# Altium PCB Column.PcbDoc (part 2 of 2)
Units mm, origin at the board's own origin, x right, y up, seen from the top; angles counter-clockwise.
Board outline 110.15 x 30.8 mm, 2 copper layers (Top Layer, Bottom Layer); 69 components, 210 nets, 1010 pads, 61 vias.
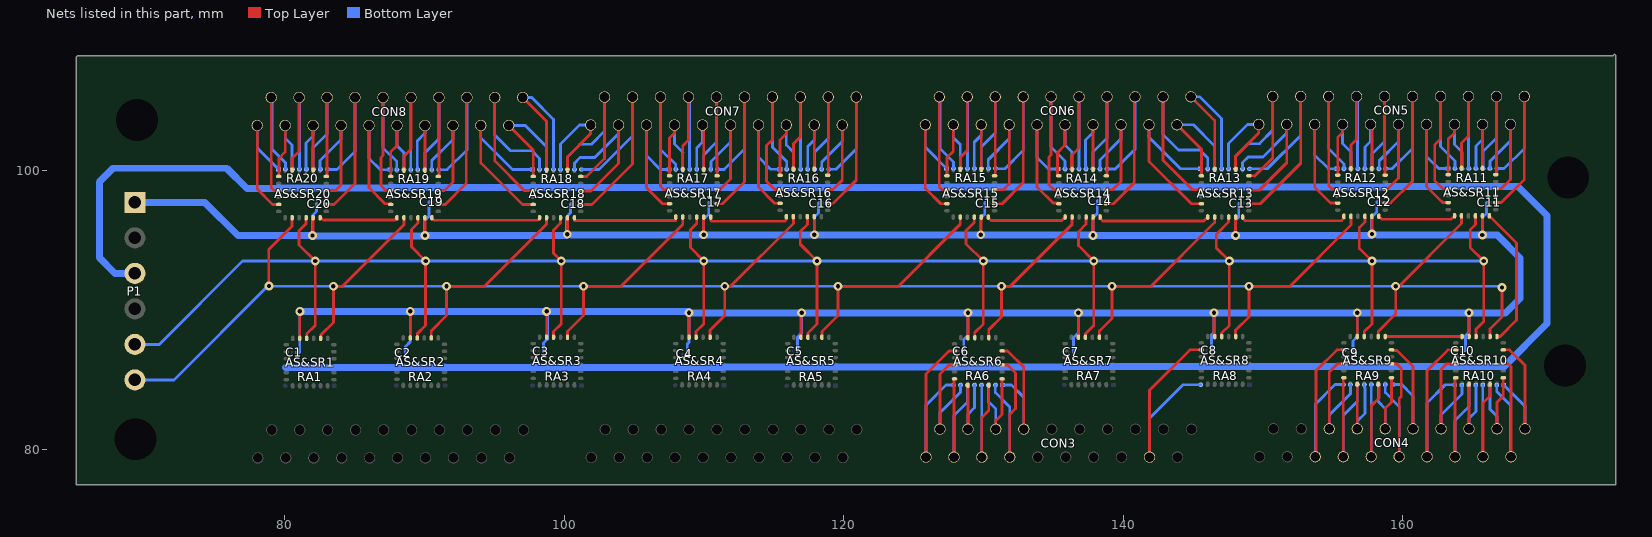
[diagram p2: the nets of this part, all layers, seen from the top]

## Via types
v1: diameter 0.635, hole 0.305, Top Layer to Bottom Layer, 61 vias

## Nets (pads, with @x,y where several pads share a name; then routed paths per layer and width w, separated by ;. In a path a pad name is that pad's centre, name@x,y a point inside that pad or via, vN(x,y) a via of type N, cw(c..) or ccw(c..) an arc to the next point about the centre after c; other vN are vias at no path point) (continued)
NewNet22: AS&SR8.2 CON3.17 RA8.8 | length 17.1
  Top Layer w0.2: CON3.17@141.894,79.471 141.894,84.254 144.79,87.15 AS&SR8.2@145.6,87.15
  Bottom Layer w0.2: CON3.17@141.894,79.471 141.894,82.254 144.29,84.65 RA8.8@145.55,84.65
NewNet23: AS&SR9.19 AS&SR10.24 | length 5.5
  Top Layer w0.2: AS&SR9.19@158.75,88.1 AS&SR10.24@164.25,88.1
NewNet24: AS&SR9.17 CON4.12 RA9.1 | length 10.7
  Top Layer w0.2: AS&SR9.17@159.2,87.15 159.25,87.1 159.6,87.1 160.75,85.95 CON4.12@160.75,81.5
  Bottom Layer w0.2: RA9.1@159.26,84.66 159.86,84.66 159.9,84.7 160.75,83.85 CON4.12@160.75,81.5
NewNet25: AS&SR9.15 CON4.11 RA9.2 | length 12.8
  Top Layer w0.2: AS&SR9.15@159.2,86.15 159.55,86.15 159.9,85.8 159.9,83.8 159.75,83.65 CON4.11@159.75,79.5
  Bottom Layer w0.2: RA9.2@158.76,84.66 158.76,84.09 159.75,83.1 CON4.11@159.75,79.5
NewNet26: AS&SR9.13 CON4.10 RA9.3 | length 7.2
  Top Layer w0.2: CON4.10@158.75,81.5 158.75,82.95 159.2,83.4 AS&SR9.13@159.2,85.15
  Bottom Layer w0.2: RA9.3@158.26,84.66 158.25,84.65 158.25,83.45 158.75,82.95 CON4.10@158.75,81.5
NewNet27: AS&SR9.11 CON4.9 RA9.4 | length 10.6
  Top Layer w0.2: CON4.9@157.75,79.5 157.75,83.15 158.3,83.7 158.3,84.65 AS&SR9.11@158.25,84.7
  Bottom Layer w0.2: CON4.9@157.75,79.5 157.76,79.51 RA9.4@157.76,84.66
NewNet28: AS&SR9.8 CON4.8 RA9.5 | length 6.6
  Top Layer w0.2: CON4.8@156.75,81.5 AS&SR9.8@156.75,84.7
  Bottom Layer w0.2: CON4.8@156.75,81.5 156.75,82.05 157.3,82.6 157.3,84.459 157.26,84.499 RA9.5@157.26,84.66
NewNet29: AS&SR9.6 CON4.7 RA9.6 | length 11.2
  Top Layer w0.2: CON4.7@155.75,79.5 155.75,85.1 AS&SR9.6@155.8,85.15
  Bottom Layer w0.2: CON4.7@155.75,79.5 155.75,82.45 156.75,83.45 156.75,84.65 RA9.6@156.76,84.66
NewNet30: AS&SR9.4 CON4.6 RA9.7 | length 9.1
  Top Layer w0.2: CON4.6@154.75,81.5 154.75,85.55 155.35,86.15 AS&SR9.4@155.8,86.15
  Bottom Layer w0.2: CON4.6@154.75,81.5 154.75,82.5 156.26,84.01 RA9.7@156.26,84.66
NewNet31: AS&SR9.2 CON4.5 RA9.8 | length 15.1
  Top Layer w0.2: CON4.5@153.75,79.5 153.8,79.55 153.8,85.65 155.3,87.15 AS&SR9.2@155.8,87.15
  Bottom Layer w0.2: CON4.5@153.75,79.5 153.75,83.25 155.16,84.66 RA9.8@155.76,84.66
NewNet32: AS&SR10.17 CON4.20 RA10.1 | length 10.3
  Top Layer w0.2: AS&SR10.17@167.2,87.15 167.65,87.15 168.75,86.05 CON4.20@168.75,81.5
  Bottom Layer w0.2: RA10.1@167.23,84.63 168.75,83.11 CON4.20@168.75,81.5
NewNet33: AS&SR10.15 CON4.19 RA10.2 | length 12.6
  Top Layer w0.2: AS&SR10.15@167.2,86.15 167.55,86.15 167.75,85.95 CON4.19@167.75,79.5
  Bottom Layer w0.2: RA10.2@166.73,84.63 166.73,84.17 167.7,83.2 167.7,79.55 CON4.19@167.75,79.5
NewNet34: AS&SR10.13 CON4.18 RA10.3 | length 7.2
  Top Layer w0.2: CON4.18@166.75,81.5 166.75,83.4 167.2,83.85 AS&SR10.13@167.2,85.15
  Bottom Layer w0.2: RA10.3@166.23,84.63 166.25,84.61 166.25,82.9 166.75,82.4 CON4.18@166.75,81.5
NewNet35: AS&SR10.11 CON4.17 RA10.4 | length 10.5
  Top Layer w0.2: CON4.17@165.75,79.5 165.75,83.35 166.25,83.85 AS&SR10.11@166.25,84.7
  Bottom Layer w0.2: RA10.4@165.73,84.63 165.73,79.52 CON4.17@165.75,79.5
NewNet36: AS&SR10.8 CON4.16 RA10.5 | length 6.5
  Top Layer w0.2: CON4.16@164.75,81.5 AS&SR10.8@164.75,84.7
  Bottom Layer w0.2: CON4.16@164.75,81.5 164.75,82.25 165.25,82.75 165.25,84.61 RA10.5@165.23,84.63
NewNet37: AS&SR10.6 CON4.15 RA10.6 | length 11.2
  Top Layer w0.2: CON4.15@163.75,79.5 163.75,85.1 AS&SR10.6@163.8,85.15
  Bottom Layer w0.2: CON4.15@163.75,79.5 163.75,82.1 164.75,83.1 164.75,84.61 RA10.6@164.73,84.63
NewNet38: AS&SR10.4 CON4.14 RA10.7 | length 9.2
  Top Layer w0.2: CON4.14@162.75,81.5 162.75,85.75 163.15,86.15 AS&SR10.4@163.8,86.15
  Bottom Layer w0.2: CON4.14@162.75,81.5 162.75,82.5 164.25,84 164.25,84.61 RA10.7@164.23,84.63
NewNet39: AS&SR10.2 CON4.13 RA10.8 | length 15.2
  Top Layer w0.2: CON4.13@161.75,79.5 161.75,85.65 163.25,87.15 AS&SR10.2@163.8,87.15
  Bottom Layer w0.2: CON4.13@161.75,79.5 161.75,83.35 163.05,84.65 163.71,84.65 RA10.8@163.73,84.63
NewNet40: 
NewNet41: 
NewNet42: AS&SR6.17 CON3.8 RA6.1 | length 10.7
  Top Layer w0.2: AS&SR6.17@131.34,87.07 131.733,87.07 131.808,86.995 132.894,85.909 CON3.8@132.894,81.471
  Bottom Layer w0.2: RA6.1@131.36,84.63 132.02,84.63 132.894,83.756 CON3.8@132.894,81.471
NewNet43: AS&SR6.15 CON3.7 RA6.2 | length 13
  Top Layer w0.2: AS&SR6.15@131.34,86.07 131.733,86.07 131.808,85.995 132.31,85.493 132.31,82.94 131.894,82.524 CON3.7@131.894,79.471
  Bottom Layer w0.2: RA6.2@130.86,84.63 130.86,84.09 131.894,83.056 CON3.7@131.894,79.471
NewNet44: AS&SR6.13 CON3.6 RA6.3 | length 7.2
  Top Layer w0.2: CON3.6@130.894,81.471 130.894,82.084 131.34,82.53 AS&SR6.13@131.34,85.07
  Bottom Layer w0.2: RA6.3@130.36,84.63 130.36,83.44 130.894,82.906 CON3.6@130.894,81.471
NewNet45: AS&SR6.11 CON3.5 RA6.4 | length 10.5
  Top Layer w0.2: CON3.5@129.894,79.471 129.894,82.314 130.39,82.81 AS&SR6.11@130.39,84.62
  Bottom Layer w0.2: RA6.4@129.86,84.63 129.885,84.605 129.885,79.48 CON3.5@129.894,79.471
NewNet46: AS&SR6.8 CON3.4 RA6.5 | length 6.5
  Top Layer w0.2: AS&SR6.8@128.89,84.62 128.894,84.616 CON3.4@128.894,81.471
  Bottom Layer w0.2: CON3.4@128.894,81.471 128.894,82.544 129.36,83.01 RA6.5@129.36,84.63
NewNet47: AS&SR6.6 CON3.3 RA6.6 | length 11.2
  Top Layer w0.2: CON3.3@127.894,79.471 AS&SR6.6@127.894,85.024 ; AS&SR6.6@127.894,85.024 AS&SR6.6@127.94,85.07 AS&SR6.6@127.894,85.024
  Bottom Layer w0.2: CON3.3@127.894,79.471 127.894,82.444 128.86,83.41 RA6.6@128.86,84.63
NewNet48: AS&SR6.4 CON3.2 RA6.7 | length 9
  Top Layer w0.2: CON3.2@126.894,81.471 126.894,85.417 127.547,86.07 AS&SR6.4@127.94,86.07
  Bottom Layer w0.2: CON3.2@126.894,81.471 126.894,82.644 128.36,84.11 RA6.7@128.36,84.63
NewNet49: AS&SR6.2 CON3.1 RA6.8 | length 15
  Top Layer w0.2: CON3.1@125.894,79.471 125.894,85.417 127.547,87.07 AS&SR6.2@127.94,87.07
  Bottom Layer w0.2: CON3.1@125.894,79.471 125.894,83.184 127.34,84.63 RA6.8@127.86,84.63
NewNet50: 
NewNet51: 
NewNet52: 
NewNet53: 
NewNet54: AS&SR16.19 AS&SR17.24 | length 5.9
  Top Layer w0.2: AS&SR17.24@110.5,96.65 110.5,96.42 110.57,96.35 115.79,96.35 115.91,96.47 AS&SR16.19@115.91,96.68
NewNet55: AS&SR16.17 CON7.8 RA16.1 | length 10.7
  Top Layer w0.2: CON7.8@113.906,103.229 113.906,98.791 114.992,97.705 115.067,97.63 AS&SR16.17@115.46,97.63
  Bottom Layer w0.2: CON7.8@113.906,103.229 113.906,100.944 114.78,100.07 RA16.1@115.44,100.07
NewNet56: AS&SR16.15 CON7.7 RA16.2 | length 13
  Top Layer w0.2: CON7.7@114.906,105.229 114.906,102.176 114.49,101.76 114.49,99.207 114.992,98.705 115.067,98.63 AS&SR16.15@115.46,98.63
  Bottom Layer w0.2: CON7.7@114.906,105.229 114.906,101.644 115.94,100.61 RA16.2@115.94,100.07
NewNet57: AS&SR16.13 CON7.6 RA16.3 | length 7.2
  Top Layer w0.2: AS&SR16.13@115.46,99.63 115.46,102.17 115.906,102.616 CON7.6@115.906,103.229
  Bottom Layer w0.2: CON7.6@115.906,103.229 115.906,101.794 116.44,101.26 RA16.3@116.44,100.07
NewNet58: AS&SR16.11 CON7.5 RA16.4 | length 10.5
  Top Layer w0.2: AS&SR16.11@116.41,100.08 116.41,101.89 116.906,102.386 CON7.5@116.906,105.229
  Bottom Layer w0.2: CON7.5@116.906,105.229 116.915,105.22 116.915,100.095 RA16.4@116.94,100.07
NewNet59: AS&SR16.8 CON7.4 RA16.5 | length 6.5
  Top Layer w0.2: CON7.4@117.906,103.229 117.906,100.084 AS&SR16.8@117.91,100.08
  Bottom Layer w0.2: RA16.5@117.44,100.07 117.44,101.69 117.906,102.156 CON7.4@117.906,103.229
NewNet60: AS&SR16.6 CON7.3 RA16.6 | length 11.2
  Top Layer w0.2: CON7.3@118.906,105.229 AS&SR16.6@118.906,99.676 ; AS&SR16.6@118.906,99.676 AS&SR16.6@118.86,99.63 AS&SR16.6@118.906,99.676
  Bottom Layer w0.2: RA16.6@117.94,100.07 117.94,101.29 118.906,102.256 CON7.3@118.906,105.229
NewNet61: AS&SR16.4 CON7.2 RA16.7 | length 9
  Top Layer w0.2: AS&SR16.4@118.86,98.63 119.253,98.63 119.906,99.283 CON7.2@119.906,103.229
  Bottom Layer w0.2: RA16.7@118.44,100.07 118.44,100.59 119.906,102.056 CON7.2@119.906,103.229
NewNet62: AS&SR16.2 CON7.1 RA16.8 | length 15
  Top Layer w0.2: AS&SR16.2@118.86,97.63 119.253,97.63 120.906,99.283 CON7.1@120.906,105.229
  Bottom Layer w0.2: RA16.8@118.94,100.07 119.46,100.07 120.906,101.516 CON7.1@120.906,105.229
NewNet63: AS&SR19.19 AS&SR20.24 | length 5.6
  Top Layer w0.2: AS&SR20.24@82.55,96.6 82.6,96.6 82.76,96.44 87.89,96.44 AS&SR19.19@88.05,96.6
NewNet64: AS&SR20.17 CON8.20 RA20.1 | length 10.3
  Top Layer w0.2: CON8.20@78.05,103.2 78.05,98.65 79.15,97.55 AS&SR20.17@79.6,97.55
  Bottom Layer w0.2: CON8.20@78.05,103.2 78.05,101.59 RA20.1@79.57,100.07
NewNet65: AS&SR20.15 CON8.19 RA20.2 | length 12.6
  Top Layer w0.2: CON8.19@79.05,105.2 79.05,98.75 79.25,98.55 AS&SR20.15@79.6,98.55
  Bottom Layer w0.2: CON8.19@79.05,105.2 79.1,105.15 79.1,101.5 80.07,100.53 RA20.2@80.07,100.07
NewNet66: AS&SR20.13 CON8.18 RA20.3 | length 7.2
  Top Layer w0.2: AS&SR20.13@79.6,99.55 79.6,100.85 80.05,101.3 CON8.18@80.05,103.2
  Bottom Layer w0.2: CON8.18@80.05,103.2 80.05,102.3 80.55,101.8 80.55,100.09 RA20.3@80.57,100.07
NewNet67: AS&SR20.11 CON8.17 RA20.4 | length 10.5
  Top Layer w0.2: AS&SR20.11@80.55,100 80.55,100.85 81.05,101.35 CON8.17@81.05,105.2
  Bottom Layer w0.2: CON8.17@81.05,105.2 81.07,105.18 RA20.4@81.07,100.07
NewNet68: AS&SR20.8 CON8.16 RA20.5 | length 6.5
  Top Layer w0.2: AS&SR20.8@82.05,100 CON8.16@82.05,103.2
  Bottom Layer w0.2: RA20.5@81.57,100.07 81.55,100.09 81.55,101.95 82.05,102.45 CON8.16@82.05,103.2
NewNet69: AS&SR20.6 CON8.15 RA20.6 | length 11.2
  Top Layer w0.2: AS&SR20.6@83,99.55 83.05,99.6 CON8.15@83.05,105.2
  Bottom Layer w0.2: RA20.6@82.07,100.07 82.05,100.09 82.05,101.6 83.05,102.6 CON8.15@83.05,105.2
NewNet70: AS&SR20.4 CON8.14 RA20.7 | length 9.2
  Top Layer w0.2: AS&SR20.4@83,98.55 83.65,98.55 84.05,98.95 CON8.14@84.05,103.2
  Bottom Layer w0.2: RA20.7@82.57,100.07 82.55,100.09 82.55,100.7 84.05,102.2 CON8.14@84.05,103.2
NewNet71: AS&SR20.2 CON8.13 RA20.8 | length 15.2
  Top Layer w0.2: AS&SR20.2@83,97.55 83.55,97.55 85.05,99.05 CON8.13@85.05,105.2
  Bottom Layer w0.2: RA20.8@83.07,100.07 83.09,100.05 83.75,100.05 85.05,101.35 CON8.13@85.05,105.2
NewNet72: AS&SR18.19 AS&SR19.24 | length 7.9
  Top Layer w0.2: AS&SR19.24@90.55,96.6 90.74,96.41 90.75,96.42 98.11,96.42 98.25,96.56 AS&SR18.19@98.25,96.6
NewNet73: AS&SR19.17 CON8.12 RA19.1 | length 10.7
  Top Layer w0.2: CON8.12@86.05,103.2 86.05,98.75 87.2,97.6 87.55,97.6 AS&SR19.17@87.6,97.55
  Bottom Layer w0.2: CON8.12@86.05,103.2 86.05,100.85 86.9,100 86.94,100.04 RA19.1@87.54,100.04
NewNet74: AS&SR19.15 CON8.11 RA19.2 | length 12.8
  Top Layer w0.2: CON8.11@87.05,105.2 87.05,101.05 86.9,100.9 86.9,98.9 87.25,98.55 AS&SR19.15@87.6,98.55
  Bottom Layer w0.2: CON8.11@87.05,105.2 87.05,101.6 88.04,100.61 RA19.2@88.04,100.04
NewNet75: AS&SR19.13 CON8.10 RA19.3 | length 7.2
  Top Layer w0.2: AS&SR19.13@87.6,99.55 87.6,101.3 88.05,101.75 CON8.10@88.05,103.2
  Bottom Layer w0.2: CON8.10@88.05,103.2 88.05,101.75 88.55,101.25 88.55,100.05 RA19.3@88.54,100.04
NewNet76: AS&SR19.11 CON8.9 RA19.4 | length 10.5
  Top Layer w0.2: AS&SR19.11@88.54,100.05 88.54,101 89.05,101.51 CON8.9@89.05,105.2
  Bottom Layer w0.2: RA19.4@89.04,100.04 89.04,105.19 CON8.9@89.05,105.2
NewNet77: AS&SR19.8 CON8.8 RA19.5 | length 6.6
  Top Layer w0.2: AS&SR19.8@90.05,100 CON8.8@90.05,103.2
  Bottom Layer w0.2: RA19.5@89.54,100.04 89.54,100.201 89.5,100.241 89.5,102.1 90.05,102.65 CON8.8@90.05,103.2
NewNet78: AS&SR19.6 CON8.7 RA19.6 | length 11.2
  Top Layer w0.2: AS&SR19.6@91,99.55 91.05,99.6 CON8.7@91.05,105.2
  Bottom Layer w0.2: RA19.6@90.04,100.04 90.05,100.05 90.05,101.25 91.05,102.25 CON8.7@91.05,105.2
NewNet79: AS&SR19.4 CON8.6 RA19.7 | length 9.1
  Top Layer w0.2: AS&SR19.4@91,98.55 91.45,98.55 92.05,99.15 CON8.6@92.05,103.2
  Bottom Layer w0.2: RA19.7@90.54,100.04 90.54,100.69 92.05,102.2 CON8.6@92.05,103.2
NewNet80: AS&SR19.2 CON8.5 RA19.8 | length 15.1
  Top Layer w0.2: AS&SR19.2@91,97.55 91.5,97.55 93,99.05 93,105.15 CON8.5@93.05,105.2
  Bottom Layer w0.2: RA19.8@91.04,100.04 91.64,100.04 93.05,101.45 CON8.5@93.05,105.2
NewNet81: AS&SR17.19 AS&SR18.24 | length 7.7
  Top Layer w0.2: AS&SR18.24@100.75,96.6 100.75,96.43 100.77,96.41 108,96.41 AS&SR17.19@108,96.65
NewNet82: AS&SR18.17 CON8.4 RA18.1 | length 13.2
  Top Layer w0.2: CON8.4@94.05,103.2 94.05,100.52 97.02,97.55 AS&SR18.17@97.8,97.55
  Bottom Layer w0.2: CON8.4@94.05,103.2 94.05,102.31 96.31,100.05 RA18.1@97.75,100.05
NewNet83: AS&SR18.15 CON8.3 RA18.2 | length 15.5
  Top Layer w0.2: CON8.3@95.05,105.2 95.05,100.66 97.16,98.55 AS&SR18.15@97.8,98.55
  Bottom Layer w0.2: CON8.3@95.05,105.2 95.05,102.5 96.16,101.39 97.7,101.39 98.25,100.84 RA18.2@98.25,100.05
NewNet84: AS&SR18.13 CON8.2 RA18.3 | length 9.3
  Top Layer w0.2: CON8.2@96.05,103.2 97.8,101.45 AS&SR18.13@97.8,99.55
  Bottom Layer w0.2: CON8.2@96.05,103.2 97.23,103.2 98.75,101.68 RA18.3@98.75,100.05
NewNet85: AS&SR18.11 CON8.1 RA18.4 | length 12.3
  Top Layer w0.2: CON8.1@97.05,105.2 98.75,103.5 AS&SR18.11@98.75,100
  Bottom Layer w0.2: CON8.1@97.05,105.2 97.69,105.2 99.25,103.64 RA18.4@99.25,100.05
NewNet86: AS&SR18.8 CON7.20 RA18.5 | length 8.5
  Top Layer w0.2: AS&SR18.8@100.25,100 100.25,100.95 101.906,102.606 CON7.20@101.906,103.229
  Bottom Layer w0.2: RA18.5@99.75,100.05 99.75,101.87 101.109,103.229 CON7.20@101.906,103.229
NewNet87: AS&SR18.6 CON7.19 RA18.6 | length 13.4
  Top Layer w0.2: AS&SR18.6@101.2,99.55 101.61,99.55 101.62,99.54 102.906,100.826 CON7.19@102.906,105.229
  Bottom Layer w0.2: RA18.6@100.25,100.05 100.25,100.95 101.15,101.85 101.95,101.85 102.906,102.806 CON7.19@102.906,105.229
NewNet88: AS&SR18.4 CON7.18 RA18.7 | length 11.4
  Top Layer w0.2: AS&SR18.4@101.2,98.55 101.23,98.52 101.94,98.52 103.906,100.486 CON7.18@103.906,103.229
  Bottom Layer w0.2: RA18.7@100.75,100.05 100.75,100.5 101.15,100.9 102.2,100.9 103.906,102.606 CON7.18@103.906,103.229
NewNet89: AS&SR18.2 CON7.17 RA18.8 | length 17.1
  Top Layer w0.2: AS&SR18.2@101.2,97.55 102.01,97.55 104.906,100.446 CON7.17@104.906,105.229
  Bottom Layer w0.2: RA18.8@101.25,100.05 102.51,100.05 104.906,102.446 CON7.17@104.906,105.229
NewNet90: AS&SR17.17 CON7.16 RA17.1 | length 10.8
  Top Layer w0.2: CON7.16@105.906,103.229 105.906,98.744 107.05,97.6 AS&SR17.17@107.55,97.6
  Bottom Layer w0.2: CON7.16@105.906,103.229 105.906,101.044 106.89,100.06 RA17.1@107.5,100.06
NewNet91: AS&SR17.15 CON7.15 RA17.2 | length 12.8
  Top Layer w0.2: CON7.15@106.906,105.229 106.906,98.844 107.15,98.6 AS&SR17.15@107.55,98.6
  Bottom Layer w0.2: CON7.15@106.906,105.229 106.906,101.494 108,100.4 RA17.2@108,100.06
NewNet92: AS&SR17.13 CON7.14 RA17.3 | length 7.2
  Top Layer w0.2: AS&SR17.13@107.55,99.6 107.55,102.3 107.906,102.656 CON7.14@107.906,103.229
  Bottom Layer w0.2: CON7.14@107.906,103.229 107.906,101.866 108.506,101.266 108.5,101.26 RA17.3@108.5,100.06
NewNet93: AS&SR17.11 CON7.13 RA17.4 | length 10.6
  Top Layer w0.2: AS&SR17.11@108.5,100.05 108.5,101.75 108.906,102.156 CON7.13@108.906,105.229
  Bottom Layer w0.2: CON7.13@108.906,105.229 108.975,105.16 108.975,100.085 RA17.4@109,100.06
NewNet95: AS&SR17.8 CON7.12 RA17.5 | length 6.6
  Top Layer w0.2: CON7.12@109.906,103.229 110,103.135 AS&SR17.8@110,100.05
  Bottom Layer w0.2: RA17.5@109.5,100.06 109.5,101.26 109.5,101.6 109.906,102.006 CON7.12@109.906,103.229
NewNet96: AS&SR17.6 CON7.11 RA17.6 | length 11.2
  Top Layer w0.2: CON7.11@110.906,105.229 110.906,100.999 110.941,100.964 AS&SR17.6@110.941,99.6
  Bottom Layer w0.2: RA17.6@110,100.06 110,101.1 110.906,102.006 CON7.11@110.906,105.229
NewNet97: AS&SR17.4 CON7.10 RA17.7 | length 8.9
  Top Layer w0.2: AS&SR17.4@110.95,98.6 111.126,98.6 111.906,99.38 CON7.10@111.906,103.229
  Bottom Layer w0.2: RA17.7@110.5,100.06 110.525,100.085 110.525,100.625 111.906,102.006 CON7.10@111.906,103.229
NewNet98: AS&SR17.2 CON7.9 RA17.8 | length 14.9
  Top Layer w0.2: AS&SR17.2@110.95,97.6 111.343,97.6 111.418,97.675 112.906,99.163 CON7.9@112.906,105.229
  Bottom Layer w0.2: RA17.8@111,100.06 111.46,100.06 112.906,101.506 CON7.9@112.906,105.229
NewNet99: AS&SR11.19 AS&SR12.24 | length 5.6
  Top Layer w0.2: AS&SR12.24@158.3,96.7 158.51,96.49 163.47,96.49 AS&SR11.19@163.71,96.73
NewNet101: AS&SR12.19 AS&SR13.24 | length 7.6
  Top Layer w0.2: AS&SR13.24@148.55,96.65 148.55,96.56 148.72,96.39 155.63,96.39 155.8,96.56 AS&SR12.19@155.8,96.7
NewNet102: AS&SR12.17 CON5.16 RA12.1 | length 10.8
  Top Layer w0.2: CON5.16@153.706,103.279 153.706,98.794 154.85,97.65 AS&SR12.17@155.35,97.65
  Bottom Layer w0.2: CON5.16@153.706,103.279 153.706,101.094 154.69,100.11 RA12.1@155.3,100.11
NewNet103: AS&SR12.15 CON5.15 RA12.2 | length 12.8
  Top Layer w0.2: CON5.15@154.706,105.279 154.706,98.894 154.95,98.65 AS&SR12.15@155.35,98.65
  Bottom Layer w0.2: CON5.15@154.706,105.279 154.706,101.544 155.8,100.45 RA12.2@155.8,100.11
NewNet104: AS&SR12.13 CON5.14 RA12.3 | length 7.2
  Top Layer w0.2: AS&SR12.13@155.35,99.65 155.35,102.35 155.706,102.706 CON5.14@155.706,103.279
  Bottom Layer w0.2: CON5.14@155.706,103.279 155.706,101.916 156.306,101.316 156.3,101.31 RA12.3@156.3,100.11
NewNet105: AS&SR12.11 CON5.13 RA12.4 | length 10.6
  Top Layer w0.2: AS&SR12.11@156.3,100.1 156.3,101.8 156.706,102.206 CON5.13@156.706,105.279
  Bottom Layer w0.2: CON5.13@156.706,105.279 156.775,105.21 156.775,100.135 RA12.4@156.8,100.11
NewNet106: 
NewNet107: AS&SR12.8 CON5.12 RA12.5 | length 6.6
  Top Layer w0.2: CON5.12@157.706,103.279 157.8,103.185 AS&SR12.8@157.8,100.1
  Bottom Layer w0.2: RA12.5@157.3,100.11 157.3,101.31 157.3,101.65 157.706,102.056 CON5.12@157.706,103.279
NewNet108: AS&SR12.6 CON5.11 RA12.6 | length 11.2
  Top Layer w0.2: CON5.11@158.706,105.279 158.706,101.049 158.741,101.014 AS&SR12.6@158.741,99.65
  Bottom Layer w0.2: RA12.6@157.8,100.11 157.8,101.15 158.706,102.056 CON5.11@158.706,105.279
NewNet109: AS&SR12.4 CON5.10 RA12.7 | length 8.9
  Top Layer w0.2: AS&SR12.4@158.75,98.65 158.926,98.65 159.706,99.43 CON5.10@159.706,103.279
  Bottom Layer w0.2: RA12.7@158.3,100.11 158.325,100.135 158.325,100.675 159.706,102.056 CON5.10@159.706,103.279
NewNet110: AS&SR12.2 CON5.9 RA12.8 | length 14.9
  Top Layer w0.2: AS&SR12.2@158.75,97.65 159.143,97.65 160.706,99.213 CON5.9@160.706,105.279
  Bottom Layer w0.2: RA12.8@158.8,100.11 159.26,100.11 160.706,101.556 CON5.9@160.706,105.279
NewNet111: AS&SR13.19 AS&SR14.24 | length 8
  Top Layer w0.2: AS&SR14.24@138.35,96.65 138.35,96.57 138.55,96.37 145.77,96.37 AS&SR13.19@146.05,96.65
NewNet112: AS&SR13.17 CON6.4 RA13.1 | length 13.2
  Top Layer w0.2: CON6.4@141.85,103.25 141.85,100.63 144.88,97.6 AS&SR13.17@145.6,97.6
  Bottom Layer w0.2: CON6.4@141.85,103.25 141.85,102.36 144.11,100.1 RA13.1@145.55,100.1
NewNet113: AS&SR13.15 CON6.3 RA13.2 | length 15.5
  Top Layer w0.2: CON6.3@142.85,105.25 142.85,100.71 144.96,98.6 AS&SR13.15@145.6,98.6
  Bottom Layer w0.2: CON6.3@142.85,105.25 142.85,102.55 143.96,101.44 145.5,101.44 146.05,100.89 RA13.2@146.05,100.1
NewNet114: AS&SR13.13 CON6.2 RA13.3 | length 9.3
  Top Layer w0.2: CON6.2@143.85,103.25 145.6,101.5 AS&SR13.13@145.6,99.6
  Bottom Layer w0.2: CON6.2@143.85,103.25 145.03,103.25 146.55,101.73 RA13.3@146.55,100.1
NewNet115: AS&SR13.11 CON6.1 RA13.4 | length 12.3
  Top Layer w0.2: CON6.1@144.85,105.25 146.55,103.55 AS&SR13.11@146.55,100.05
  Bottom Layer w0.2: CON6.1@144.85,105.25 145.49,105.25 147.05,103.69 RA13.4@147.05,100.1
NewNet116: AS&SR13.8 CON5.20 RA13.5 | length 8.5
  Top Layer w0.2: AS&SR13.8@148.05,100.05 148.05,101 149.706,102.656 CON5.20@149.706,103.279
  Bottom Layer w0.2: RA13.5@147.55,100.1 147.55,101.92 148.909,103.279 CON5.20@149.706,103.279
NewNet117: AS&SR13.6 CON5.19 RA13.6 | length 13.4
  Top Layer w0.2: AS&SR13.6@149,99.6 149.41,99.6 149.42,99.59 150.706,100.876 CON5.19@150.706,105.279
  Bottom Layer w0.2: RA13.6@148.05,100.1 148.05,101 148.95,101.9 149.75,101.9 150.706,102.856 CON5.19@150.706,105.279
NewNet118: AS&SR13.4 CON5.18 RA13.7 | length 11.4
  Top Layer w0.2: AS&SR13.4@149,98.6 149.03,98.57 149.74,98.57 151.706,100.536 CON5.18@151.706,103.279
  Bottom Layer w0.2: RA13.7@148.55,100.1 148.55,100.55 148.95,100.95 150,100.95 151.706,102.656 CON5.18@151.706,103.279
NewNet119: AS&SR13.2 CON5.17 RA13.8 | length 17.1
  Top Layer w0.2: AS&SR13.2@149,97.6 149.81,97.6 152.706,100.496 CON5.17@152.706,105.279
  Bottom Layer w0.2: RA13.8@149.05,100.1 150.31,100.1 152.706,102.496 CON5.17@152.706,105.279
NewNet120: AS&SR14.19 AS&SR15.24 | length 5.7
  Top Layer w0.2: AS&SR15.24@130.35,96.65 130.35,96.61 130.55,96.41 135.61,96.41 AS&SR14.19@135.85,96.65
NewNet121: AS&SR14.17 CON6.12 RA14.1 | length 10.7
  Top Layer w0.2: CON6.12@133.85,103.25 133.85,98.8 135,97.65 135.35,97.65 AS&SR14.17@135.4,97.6
  Bottom Layer w0.2: CON6.12@133.85,103.25 133.85,100.9 134.7,100.05 134.74,100.09 RA14.1@135.34,100.09
NewNet122: AS&SR14.15 CON6.11 RA14.2 | length 12.8
  Top Layer w0.2: CON6.11@134.85,105.25 134.85,101.1 134.7,100.95 134.7,98.95 135.05,98.6 AS&SR14.15@135.4,98.6
  Bottom Layer w0.2: CON6.11@134.85,105.25 134.85,101.65 135.84,100.66 RA14.2@135.84,100.09
NewNet123: AS&SR14.13 CON6.10 RA14.3 | length 7.3
  Top Layer w0.2: AS&SR14.13@135.4,99.6 135.3,99.7 135.3,101.25 135.85,101.8 CON6.10@135.85,103.25
  Bottom Layer w0.2: CON6.10@135.85,103.25 135.85,101.8 136.35,101.3 136.35,100.1 RA14.3@136.34,100.09
NewNet124: AS&SR14.11 CON6.9 RA14.4 | length 10.6
  Top Layer w0.2: AS&SR14.11@136.35,100.05 136.3,100.1 136.3,101.05 136.85,101.6 CON6.9@136.85,105.25
  Bottom Layer w0.2: RA14.4@136.84,100.09 136.84,105.24 CON6.9@136.85,105.25
NewNet125: AS&SR14.8 CON6.8 RA14.5 | length 6.6
  Top Layer w0.2: AS&SR14.8@137.85,100.05 CON6.8@137.85,103.25
  Bottom Layer w0.2: RA14.5@137.34,100.09 137.34,100.251 137.3,100.291 137.3,102.15 137.85,102.7 CON6.8@137.85,103.25
NewNet126: AS&SR14.6 CON6.7 RA14.6 | length 11.2
  Top Layer w0.2: AS&SR14.6@138.8,99.6 138.85,99.65 CON6.7@138.85,105.25
  Bottom Layer w0.2: RA14.6@137.84,100.09 137.85,100.1 137.85,101.3 138.85,102.3 CON6.7@138.85,105.25
NewNet127: AS&SR14.4 CON6.6 RA14.7 | length 9.1
  Top Layer w0.2: AS&SR14.4@138.8,98.6 139.25,98.6 139.85,99.2 CON6.6@139.85,103.25
  Bottom Layer w0.2: RA14.7@138.34,100.09 138.34,100.74 139.85,102.25 CON6.6@139.85,103.25
NewNet128: AS&SR14.2 CON6.5 RA14.8 | length 15.1
  Top Layer w0.2: AS&SR14.2@138.8,97.6 139.3,97.6 140.8,99.1 140.8,105.2 CON6.5@140.85,105.25
  Bottom Layer w0.2: RA14.8@138.84,100.09 139.44,100.09 140.85,101.5 CON6.5@140.85,105.25
NewNet129: AS&SR15.17 CON6.20 RA15.1 | length 10.3
  Top Layer w0.2: CON6.20@125.85,103.25 125.85,98.7 126.95,97.6 AS&SR15.17@127.4,97.6
  Bottom Layer w0.2: CON6.20@125.85,103.25 125.85,101.64 RA15.1@127.37,100.12
NewNet130: AS&SR15.15 CON6.19 RA15.2 | length 12.6
  Top Layer w0.2: CON6.19@126.85,105.25 126.85,98.8 127.05,98.6 AS&SR15.15@127.4,98.6
  Bottom Layer w0.2: CON6.19@126.85,105.25 126.9,105.2 126.9,101.55 127.87,100.58 RA15.2@127.87,100.12
NewNet131: AS&SR15.13 CON6.18 RA15.3 | length 7.2
  Top Layer w0.2: AS&SR15.13@127.4,99.6 127.4,100.9 127.85,101.35 CON6.18@127.85,103.25
  Bottom Layer w0.2: CON6.18@127.85,103.25 127.85,102.35 128.35,101.85 128.35,100.14 RA15.3@128.37,100.12
NewNet132: AS&SR15.11 CON6.17 RA15.4 | length 10.5
  Top Layer w0.2: AS&SR15.11@128.35,100.05 128.35,100.9 128.85,101.4 CON6.17@128.85,105.25
  Bottom Layer w0.2: CON6.17@128.85,105.25 128.87,105.23 RA15.4@128.87,100.12
NewNet133: AS&SR15.8 CON6.16 RA15.5 | length 6.5
  Top Layer w0.2: AS&SR15.8@129.85,100.05 CON6.16@129.85,103.25
  Bottom Layer w0.2: RA15.5@129.37,100.12 129.35,100.14 129.35,102 129.85,102.5 CON6.16@129.85,103.25
NewNet134: AS&SR15.6 CON6.15 RA15.6 | length 11.2
  Top Layer w0.2: AS&SR15.6@130.8,99.6 130.85,99.65 CON6.15@130.85,105.25
  Bottom Layer w0.2: RA15.6@129.87,100.12 129.85,100.14 129.85,101.65 130.85,102.65 CON6.15@130.85,105.25
NewNet135: AS&SR15.4 CON6.14 RA15.7 | length 9.2
  Top Layer w0.2: AS&SR15.4@130.8,98.6 131.45,98.6 131.85,99 CON6.14@131.85,103.25
  Bottom Layer w0.2: RA15.7@130.37,100.12 130.35,100.14 130.35,100.75 131.85,102.25 CON6.14@131.85,103.25
NewNet136: AS&SR15.2 CON6.13 RA15.8 | length 15.2
  Top Layer w0.2: AS&SR15.2@130.8,97.6 131.35,97.6 132.85,99.1 CON6.13@132.85,105.25
  Bottom Layer w0.2: RA15.8@130.87,100.12 130.89,100.1 131.55,100.1 132.85,101.4 CON6.13@132.85,105.25
NewNet137: AS&SR10.19 AS&SR11.24 | length 10.1
  Top Layer w0.2: AS&SR11.24@166.21,96.73 168.15,94.79 168.15,89.27 166.98,88.1 AS&SR10.19@166.75,88.1
NewNet138: AS&SR1.22 AS&SR2.22 AS&SR3.22 AS&SR4.22 AS&SR5.22 AS&SR6.22 AS&SR7.22 AS&SR8.22 AS&SR9.22 AS&SR10.22 AS&SR11.22 AS&SR12.22 AS&SR13.22 AS&SR14.22 AS&SR15.22 AS&SR16.22 AS&SR17.22 AS&SR18.22 AS&SR19.22 AS&SR20.22 P1.5 | length 193.7
  Top Layer w0.2: AS&SR20.22@81.55,96.6 81.55,96.17 81.05,95.67 81.05,94.65 v1(82.2,93.5) 82.2,88.9 81.59,88.29 AS&SR1.22@81.59,87.97 ; AS&SR2.22@89.5,88 89.5,88.3 90.1,88.9 v1(90.1,93.5) 89.08,94.52 89.08,95.76 89.55,96.23 AS&SR19.22@89.55,96.6 ; AS&SR3.22@99.25,88.05 99.25,88.45 99.8,89 v1(99.8,93.5) 99.24,94.06 99.24,95.7 99.75,96.21 AS&SR18.22@99.75,96.6 ; AS&SR4.22@109.45,88.05 109.45,88.45 110,89 v1(110,93.5) 109.04,94.46 109.04,95.74 109.5,96.2 AS&SR17.22@109.5,96.65 ; AS&SR16.22@117.41,96.68 117.41,96.12 116.9,95.61 116.9,94.7 v1(118.1,93.5) 118.1,89 117.45,88.35 AS&SR5.22@117.45,88.05 ; AS&SR15.22@129.35,96.65 129.35,96.25 128.77,95.67 128.77,94.73 v1(130,93.5) 130,89 129.39,88.39 AS&SR6.22@129.39,88.02 ; AS&SR7.22@137.3,88.05 137.3,88.3 137.9,88.9 v1(137.9,93.5) 136.8,94.6 136.8,95.59 137.35,96.14 AS&SR14.22@137.35,96.65 ; AS&SR8.22@147.05,88.1 147.05,88.35 147.6,88.9 v1(147.6,93.5) 146.66,94.44 146.66,95.4 147.55,96.29 AS&SR13.22@147.55,96.65 ; AS&SR9.22@157.25,88.1 157.25,88.45 157.8,89 v1(157.8,93.5) 156.9,94.4 156.9,95.9 157.3,96.3 AS&SR12.22@157.3,96.7 ; AS&SR11.22@165.21,96.73 165.21,96.11 164.83,95.73 164.83,94.47 v1(165.8,93.5) 165.8,89.17 165.25,88.62 AS&SR10.22@165.25,88.1
  Bottom Layer w0.2: P1.5@69.3,87.54 71.04,87.54 77,93.5 v1(82.2,93.5) v1(90.1,93.5) v1(99.8,93.5) v1(110,93.5) v1(118.1,93.5) v1(130,93.5) v1(137.9,93.5) v1(147.6,93.5) v1(157.8,93.5) v1(165.8,93.5)
NewNet139: AS&SR1.20 AS&SR2.20 AS&SR3.20 AS&SR4.20 AS&SR5.20 AS&SR6.20 AS&SR7.20 AS&SR8.20 AS&SR9.20 AS&SR10.20 AS&SR11.20 AS&SR12.20 AS&SR13.20 AS&SR14.20 AS&SR15.20 AS&SR16.20 AS&SR17.20 AS&SR18.20 AS&SR19.20 AS&SR20.20 P1.6 | length 225.5
  Top Layer w0.2: v1(78.89,91.71) 78.87,91.73 78.87,94.31 80.55,95.99 AS&SR20.20@80.55,96.6 ; AS&SR1.20@82.59,87.97 82.59,88.19 83.5,89.1 v1(83.5,91.7) 84.15,91.7 88.55,96.1 AS&SR19.20@88.55,96.6 ; AS&SR2.20@90.5,88 90.5,88.5 91.6,89.6 v1(91.6,91.7) 94.32,91.7 98.75,96.13 AS&SR18.20@98.75,96.6 ; AS&SR3.20@100.25,88.05 100.25,88.45 101.4,89.6 v1(101.4,91.7) 104.07,91.7 108.5,96.13 AS&SR17.20@108.5,96.65 ; AS&SR4.20@110.45,88.05 110.45,88.55 111.5,89.6 v1(111.5,91.7) 111.91,91.7 116.41,96.2 AS&SR16.20@116.41,96.68 ; AS&SR5.20@118.45,88.05 118.45,88.45 119.6,89.6 119.6,91.6 119.5,91.7 v1(119.6,91.7) 123.92,91.7 128.35,96.13 AS&SR15.20@128.35,96.65 ; AS&SR6.20@130.39,88.02 130.39,88.59 131.3,89.5 v1(131.3,91.7) 131.93,91.7 136.36,96.13 136.35,96.14 AS&SR14.20@136.35,96.65 ; AS&SR7.20@138.3,88.05 138.3,88.5 139.2,89.4 v1(139.2,91.7) 142,91.7 146.55,96.25 AS&SR13.20@146.55,96.65 ; AS&SR8.20@148.05,88.1 148.05,88.55 149,89.5 v1(149,91.7) 151.93,91.7 156.3,96.07 AS&SR12.20@156.3,96.7 ; AS&SR9.20@158.25,88.1 158.25,88.45 159.5,89.7 v1(159.5,91.7) 159.73,91.7 164.21,96.18 AS&SR11.20@164.21,96.73 ; AS&SR10.20@166.25,88.1 166.25,88.65 167.1,89.5 v1(167.1,91.6)
  Bottom Layer w0.2: P1.6@69.3,85 72.1,85 78.8,91.7 v1(83.5,91.7) v1(91.6,91.7) v1(101.4,91.7) v1(111.5,91.7) v1(119.6,91.7) v1(131.3,91.7) v1(139.2,91.7) v1(149,91.7) v1(159.5,91.7) 167,91.7 v1(167.1,91.6)
NewNet140: AS&SR11.17 CON5.8 RA11.1 | length 10.7
  Top Layer w0.2: CON5.8@161.706,103.279 161.706,98.841 162.792,97.755 162.867,97.68 AS&SR11.17@163.26,97.68
  Bottom Layer w0.2: CON5.8@161.706,103.279 161.706,100.994 162.58,100.12 RA11.1@163.24,100.12
NewNet141: AS&SR11.15 CON5.7 RA11.2 | length 13
  Top Layer w0.2: CON5.7@162.706,105.279 162.706,102.226 162.29,101.81 162.29,99.257 162.792,98.755 162.867,98.68 AS&SR11.15@163.26,98.68
  Bottom Layer w0.2: CON5.7@162.706,105.279 162.706,101.694 163.74,100.66 RA11.2@163.74,100.12
NewNet142: AS&SR11.13 CON5.6 RA11.3 | length 7.2
  Top Layer w0.2: AS&SR11.13@163.26,99.68 163.26,102.22 163.706,102.666 CON5.6@163.706,103.279
  Bottom Layer w0.2: CON5.6@163.706,103.279 163.706,101.844 164.24,101.31 RA11.3@164.24,100.12
NewNet143: AS&SR11.11 CON5.5 RA11.4 | length 10.5
  Top Layer w0.2: AS&SR11.11@164.21,100.13 164.21,101.94 164.706,102.436 CON5.5@164.706,105.279
  Bottom Layer w0.2: CON5.5@164.706,105.279 164.715,105.27 164.715,100.145 RA11.4@164.74,100.12
NewNet144: AS&SR11.8 CON5.4 RA11.5 | length 6.5
  Top Layer w0.2: CON5.4@165.706,103.279 165.706,100.134 AS&SR11.8@165.71,100.13
  Bottom Layer w0.2: RA11.5@165.24,100.12 165.24,101.74 165.706,102.206 CON5.4@165.706,103.279
NewNet145: AS&SR11.6 CON5.3 RA11.6 | length 11.2
  Top Layer w0.2: CON5.3@166.706,105.279 AS&SR11.6@166.706,99.726 ; AS&SR11.6@166.706,99.726 AS&SR11.6@166.66,99.68 AS&SR11.6@166.706,99.726
  Bottom Layer w0.2: RA11.6@165.74,100.12 165.74,101.34 166.706,102.306 CON5.3@166.706,105.279
NewNet146: AS&SR11.4 CON5.2 RA11.7 | length 9
  Top Layer w0.2: AS&SR11.4@166.66,98.68 167.053,98.68 167.706,99.333 CON5.2@167.706,103.279
  Bottom Layer w0.2: RA11.7@166.24,100.12 166.24,100.64 167.706,102.106 CON5.2@167.706,103.279
NewNet147: AS&SR11.2 CON5.1 RA11.8 | length 15
  Top Layer w0.2: AS&SR11.2@166.66,97.68 167.053,97.68 168.706,99.333 CON5.1@168.706,105.279
  Bottom Layer w0.2: RA11.8@166.74,100.12 167.26,100.12 168.706,101.566 CON5.1@168.706,105.279
R\E\S\E\T\: 
SCLK: 
VCC: AS&SR1.23 AS&SR2.23 AS&SR3.23 AS&SR4.23 AS&SR5.23 AS&SR6.23 AS&SR7.23 AS&SR8.23 AS&SR9.23 AS&SR10.23 AS&SR11.23 AS&SR12.23 AS&SR13.23 AS&SR14.23 AS&SR15.23 AS&SR16.23 AS&SR17.23 AS&SR18.23 AS&SR19.23 AS&SR20.23 C1.2 C2.2 C3.2 C4.2 C5.2 C6.2 C7.2 C8.2 C9.2 C10.2 C11.2 C12.2 C13.2 C14.2 C15.2 C16.2 C17.2 C18.2 C19.2 C20.2 P1.1 | length 275.1
  Top Layer w0.2: AS&SR1.23@81.09,87.97 81.09,89.89 v1(81.1,89.9) ; v1(82,95.33) 82.05,95.38 AS&SR20.23@82.05,96.6 ; AS&SR2.23@89,88 v1(89,89.9) ; v1(90.05,95.33) AS&SR19.23@90.05,96.6 ; AS&SR3.23@98.76,88.13 v1(98.76,89.9) ; v1(100.23,95.417) 100.25,95.437 AS&SR18.23@100.25,96.6 ; AS&SR4.23@108.95,88.1 v1(108.95,89.8) ; v1(109.99,95.38) AS&SR17.23@109.99,96.53 ; AS&SR5.23@116.95,88.05 116.95,89.75 v1(117,89.8) ; v1(117.91,95.38) AS&SR16.23@117.91,96.68 ; AS&SR6.23@128.89,88.02 128.89,89.79 v1(128.9,89.8) ; v1@129.85,95.38 AS&SR15.23@129.85,96.65 ; AS&SR7.23@136.8,88.05 v1(136.8,89.8) ; v1(137.85,95.34) AS&SR14.23@137.85,96.65 ; v1(146.5,89.8) 146.5,88.19 146.57,88.12 AS&SR8.23@146.55,88.1 ; AS&SR13.23@148.04,96.62 148.03,96.63 AS&SR13.23@148.05,96.65 ; v1(148.05,95.34) AS&SR13.23@148.05,96.55 ; AS&SR9.23@156.75,88.1 v1(156.75,89.8) ; v1(157.8,95.43) AS&SR12.23@157.8,96.75 ; AS&SR10.23@164.75,88.1 v1@164.75,89.75 ; v1(165.7,95.36) 165.71,95.37 AS&SR11.23@165.71,96.73
  Bottom Layer w0.2: 80.88,86.96 81.06,86.96 81.1,87 v1(81.1,89.9) ; v1(82,95.33) 82,96.75 82.3,97.05 82.3,97.6 ; 88.65,86.95 88.65,87.38 89,87.73 v1(89,89.9) ; v1@90,95.36 90,96.36 90.35,96.71 C19.2@90.35,97.75 ; 98.53,87.06 98.53,87.63 98.83,87.93 v1@98.83,89.9 ; v1@100.17,95.33 100.17,96.66 100.47,96.96 C18.2@100.47,97.59 ; 108.82,86.86 108.82,87.55 108.95,87.68 v1(108.95,89.8) ; v1(109.99,95.38) 109.99,96.47 110.35,96.83 C17.2@110.35,97.7 ; 116.7,87.05 116.7,88.07 117,88.37 v1(117,89.8) ; v1(117.91,95.38) 117.91,96.65 118.2,96.94 118.2,97.65 ; 128.6,87.05 128.6,87.89 128.9,88.19 v1(128.9,89.8) ; v1(129.82,95.38) 129.82,96.58 130.1,96.86 C15.2@130.1,97.65 ; 136.45,87 136.45,88.04 136.8,88.39 v1(136.8,89.8) ; v1(137.85,95.34) 137.85,95.38 137.85,96.59 138.15,96.89 C14.2@138.15,97.8 ; 146.33,87.11 146.33,88.23 146.5,88.4 v1(146.5,89.8) ; v1(148.05,95.34) 148.05,96.42 148.27,96.64 C13.2@148.27,97.64 ; 156.45,86.95 156.45,87.79 156.75,88.09 v1(156.75,89.8) ; v1@157.78,95.34 157.78,96.63 158.15,97 C12.2@158.15,97.75 ; 164.5,87.1 164.5,88.17 164.75,88.42 v1(164.75,89.8) ; v1(165.7,95.36) 165.7,96.61 166,96.91 C11.2@166,97.7
  Bottom Layer w0.5: P1.1@69.3,97.7 74.3,97.7 76.67,95.33 v1(82,95.33) ; v1(81.1,89.9) v1(89,89.9) v1(98.76,89.9) 98.83,89.9 v1@108.95,89.9 ; v1@82.02,95.31 90.05,95.31 v1(90.05,95.33) v1@100.17,95.33 ; v1@100.49,95.38 v1(109.99,95.38) v1(117.91,95.38) v1(129.82,95.38) v1@137.85,95.38 ; v1(108.95,89.8) v1(117,89.8) v1(128.9,89.8) v1(136.8,89.8) v1(146.5,89.8) v1(156.75,89.8) v1(164.75,89.8) 164.8,89.8 164.82,89.78 167.37,89.78 168.41,90.82 168.41,93.72 166.77,95.36 v1(165.7,95.36) 158.15,95.36 ; v1(137.85,95.34) v1(148.05,95.34) v1@157.78,95.34
VCOM: P1.3 RA1.9 RA1.10 RA1.11 RA1.12 RA1.13 RA1.14 RA1.15 RA1.16 RA2.9 RA2.10 RA2.11 RA2.12 RA2.13 RA2.14 RA2.15 RA2.16 RA3.9 RA3.10 RA3.11 RA3.12 RA3.13 RA3.14 RA3.15 RA3.16 RA4.9 RA4.10 RA4.11 RA4.12 RA4.13 RA4.14 RA4.15 RA4.16 RA5.9 RA5.10 RA5.11 RA5.12 RA5.13 RA5.14 RA5.15 RA5.16 RA6.9 RA6.10 RA6.11 RA6.12 RA6.13 RA6.14 RA6.15 RA6.16 RA7.9 RA7.10 RA7.11 RA7.12 RA7.13 RA7.14 RA7.15 RA7.16 RA8.9 RA8.10 RA8.11 RA8.12 RA8.13 RA8.14 RA8.15 RA8.16 RA9.9 RA9.10 RA9.11 RA9.12 RA9.13 RA9.14 RA9.15 RA9.16 RA10.9 RA10.10 RA10.11 RA10.12 RA10.13 RA10.14 RA10.15 RA10.16 RA11.9 RA11.10 RA11.11 RA11.12 RA11.13 RA11.14 RA11.15 RA11.16 RA12.9 RA12.10 RA12.11 RA12.12 RA12.13 RA12.14 RA12.15 RA12.16 RA13.9 RA13.10 RA13.11 RA13.12 RA13.13 RA13.14 RA13.15 RA13.16 RA14.9 RA14.10 RA14.11 RA14.12 RA14.13 RA14.14 RA14.15 RA14.16 RA15.9 RA15.10 RA15.11 RA15.12 RA15.13 RA15.14 RA15.15 RA15.16 RA16.9 RA16.10 RA16.11 RA16.12 RA16.13 RA16.14 RA16.15 RA16.16 RA17.9 RA17.10 RA17.11 RA17.12 RA17.13 RA17.14 RA17.15 RA17.16 RA18.9 RA18.10 RA18.11 RA18.12 RA18.13 RA18.14 RA18.15 RA18.16 RA19.9 RA19.10 RA19.11 RA19.12 RA19.13 RA19.14 RA19.15 RA19.16 RA20.9 RA20.10 RA20.11 RA20.12 RA20.13 RA20.14 RA20.15 RA20.16 | length 213.2
  Bottom Layer w0.5: P1.3@69.3,92.62 67.88,92.62 66.75,93.75 66.75,99.17 67.72,100.14 75.87,100.14 77.31,98.7 79.5,98.7 RA20.16@79.57,98.77 79.6,98.74 81.57,98.74 RA19.16@87.54,98.74 87.55,98.75 89.54,98.75 91.04,98.75 RA18.16@97.75,98.75 RA18.15@98.25,98.75 RA18.14@98.75,98.75 RA18.13@99.25,98.75 RA18.12@99.75,98.75 RA18.11@100.25,98.75 RA18.10@100.75,98.75 RA18.9@101.25,98.75 101.26,98.76 RA17.16@107.5,98.76 RA17.14@108.5,98.76 RA17.11@110,98.76 RA17.9@111,98.76 ; RA1.9@80.06,85.88 RA1.11@81.06,85.88 RA1.12@81.56,85.88 RA1.16@83.56,85.88 RA2.9@87.99,85.88 ; RA2.9@88,85.89 RA2.10@88.5,85.89 RA2.14@90.5,85.89 RA2.16@91.5,85.89 97.74,85.89 RA3.9@97.75,85.9 RA3.10@98.25,85.9 RA3.11@98.75,85.9 RA3.12@99.25,85.9 RA3.13@99.75,85.9 RA3.14@100.25,85.9 RA3.15@100.75,85.9 RA3.16@101.25,85.9 108.96,85.9 110.46,85.9 111.45,85.9 RA4.16@111.46,85.91 116.43,85.91 117.93,85.91 119.43,85.91 128.36,85.91 129.86,85.91 130.34,85.91 RA6.14@130.36,85.93 RA7.9@135.79,85.93 ; RA17.9@111.01,98.77 RA16.16@115.44,98.77 RA16.12@117.44,98.77 RA16.9@118.94,98.77 127.32,98.77 RA15.16@127.37,98.82 127.4,98.79 128.87,98.79 130.37,98.79 RA14.16@135.34,98.79 135.35,98.8 136.84,98.8 RA13.16@145.55,98.8 RA13.15@146.05,98.8 RA13.14@146.55,98.8 RA13.13@147.05,98.8 RA13.12@147.55,98.8 RA13.11@148.05,98.8 RA13.10@148.55,98.8 RA13.9@149.05,98.8 149.06,98.81 RA12.16@155.3,98.81 RA12.13@156.8,98.81 RA12.10@158.3,98.81 RA12.9@158.8,98.81 ; RA7.9@135.8,85.94 RA7.12@137.3,85.94 RA7.14@138.3,85.94 RA7.16@139.3,85.94 145.54,85.94 RA8.9@145.55,85.95 RA8.10@146.05,85.95 RA8.11@146.55,85.95 RA8.12@147.05,85.95 RA8.13@147.55,85.95 RA8.14@148.05,85.95 RA8.15@148.55,85.95 RA8.16@149.05,85.95 156.26,85.95 157.76,85.95 159.25,85.95 RA9.16@159.26,85.96 163.73,85.96 165.73,85.96 167.2,85.96 RA10.16@167.23,85.93 170.33,89.03 170.33,96.75 168.26,98.82 RA11.9@166.74,98.82 RA11.12@165.24,98.82 RA11.16@163.24,98.82 RA12.9@158.81,98.82
pads on no net: AS&SR20.19

## Polygon pours and split planes (outlines as drawn)
GND on Bottom Layer "POUR" (solid, pour order 6): 69.85,106.46 169.98,106.46 173.69,102.75 173.69,81.1 170.9,78.31 69.335,78.31 66.32,81.39 66.32,102.93
GND on Top Layer "POUR" (solid, pour order 5): 70.276,106.78 169.72,106.78 173.99,102.51 173.99,81.27 170.587,78.05 69.51,78.05 66.08,81.48 66.08,102.612

## Keep-outs
Keep-Out Layer:
  lines w0.254: 66.08,81.31 ccw(c69.34,81.31) 69.34,78.05 ; 66.08,102.8 cw(c70.08,102.8) 70.08,106.8 ; 170.31,106.8 cw(c170.31,103.11) 174,103.11 ; 170.67,78.05 ccw(c170.67,81.38) 174,81.38
  lines w0.3: 66.08,81.31 66.08,102.8 ; 69.34,78.05 170.67,78.05 ; 70.08,106.8 170.31,106.8 ; 174,81.38 174,103.11

## Silkscreen, mask and mechanical layers (free items; w line width, h text height)
Top Overlay:
  text "Sameer" at 75.43,100.82 h1 r90
  text "Column" at 67.48,89.26 h1 r90
  text "SINAPSE" at 172.75,87.91 h1.52 r90
  text "160X160 Taxels" at 72.01,83.18 h1 r90
  text "Inderjot" at 75.32,78.77 h1 r90
Drill Drawing:
  text ".LEGEND" at 387.922,78.994 h0.8
  text "Drill Drawing." at 387.922,76.454 h0.8

## Dimensions
69.34,106.75 to 69.11,77.78 on Top Overlay
66.03,80.52 to 174.38,80.18 on Top Overlay